# EAGLE board TMP006_breakout_v1 (EAGLE 5.11)
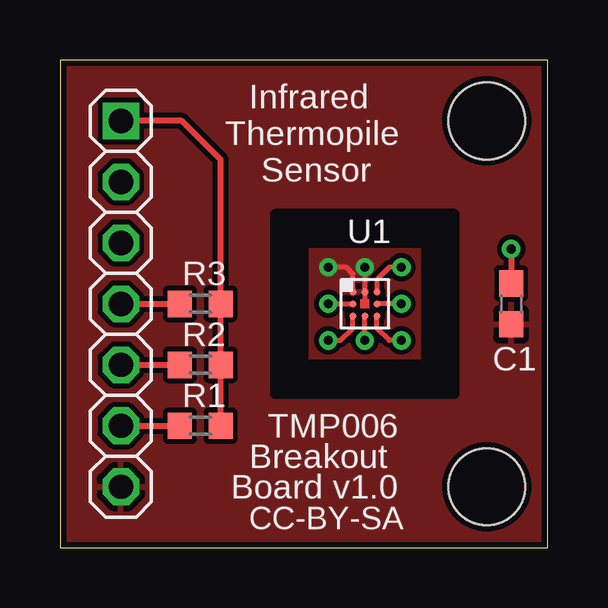
[diagram p0: board, top side]
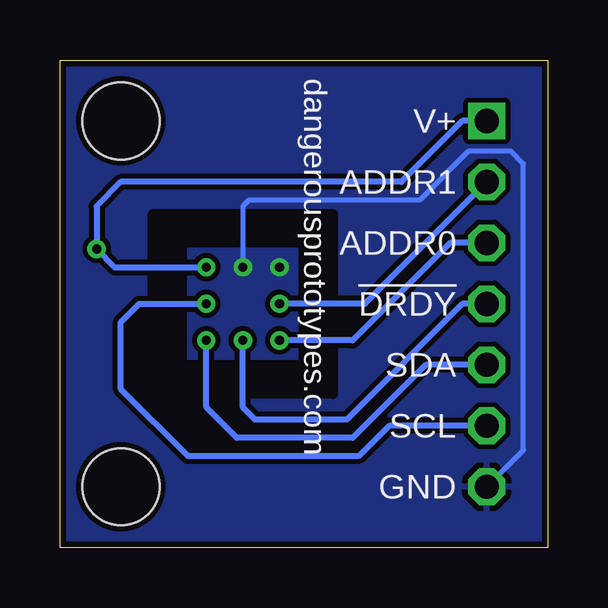
[diagram p1: board, bottom side, seen from below]

Size 20.32 x 20.32 mm. Coordinates in mm from the lower left corner, seen from the top.
Outline: 0,20.32 0,0 20.32,0 20.32,20.32 0,20.32
Copper layers (1*16): Top 0.035mm / dielectric 1.5mm / Bottom 0.035mm
Design rules "Fusion_eagle_rule_v1.1": minimum track width 6mil, minimum drill 12mil, track to track 6mil, track to pad 6mil, pad to pad 6mil, via to via 6mil, smd to smd 0mil, copper to edge 10mil, drill to drill 10mil, minimum pad ring 10mil, minimum via ring 6mil, stop-mask expansion 2mil, vias tented up to drill 100mil, thermal gap 10mil
Holes 3.2 mm at 17.78,17.78 17.78,2.54
tRestrict: area 9,6.4 to 16.4,7.6; area 9,6.4 to 10.2,13.9; area 15.2,6.4 to 16.4,13.9; area 9,12.7 to 16.4,13.9
bRestrict: area 15.2,6.4 to 16.4,13.9; area 9,6.4 to 16.4,7.6; area 9,6.4 to 10.2,13.9; area 9,12.7 to 16.4,13.9

## Footprints (pad centres in the part's own frame; a part is rotated, then mirrored left to right if it is on the bottom)
C603 = smd 1.1 x 1: 1 -0.85,0; 2 0.85,0
1X07 = drill 1.016 square: 1 -7.62,0 | drill 1.016 octagon: 2 -5.08,0; 3 -2.54,0; 4 0,0; 5 2.54,0; 6 5.08,0; 7 7.62,0
R603 = smd 1 x 1.1: 1 -0.85,0; 2 0.85,0
DSBGA-8 = smd 0.3 x 0.3: A1 -0.5,0.5; A2 0,0.5; A3 0.5,0.5; B1 -0.5,0; B3 0.5,0; C1 -0.5,-0.5; C2 0,-0.5; C3 0.5,-0.5

## Placement (x,y rotation side)
C1  0.1uF  [C603]  18.8,10.16 270 top
JP1  [1X07]  2.54,10.16 270 top
R1  10k  [R603]  5.84,5.08 0 top
R2  10k  [R603]  5.84,7.62 0 top
R3  10k  [R603]  5.84,10.16 0 top
U1  TMP006  [DSBGA-8]  12.7,10.16 0 top
U$1  DP_LOGO  [DP_LOGO]  1.78,-5.33 0 top  (outside the outline)

## Library data of the parts
C1 R1-R3 U1 = dp_devices
JP1 = pinhead
U$1 = dp_devices; FF1: fullfillment by; FF2: Seeed studio; FF3: www.seeedstudio.com; LICENSE: CC-BY-SA; PROJECT: TMP006 Breakout Board; URL1: http://; URL2: DangerousPrototypes.com

## Nets
!DRDY: JP1.4 R3.1 U1.C2
ADR0: JP1.3 U1.C1
ADR1: JP1.2 U1.B1
GND: C1.2 JP1.7 U1.A1 U1.A2
SCL: JP1.6 R1.1 U1.B3
SDA: JP1.5 R2.1 U1.C3
V+: C1.1 JP1.1 R1.2 R2.2 R3.2 U1.A3

## Tracks (layer width: path | path; a pad name or v marks a point on that pad's centre or on a via)
!DRDY  (via drill 0.38 pad 0.76)
  Top 0.203: v12.7,8.64 U1.C2
  Top 0.254: JP1.4 R3.1
  Bottom 0.254: v12.7,8.64 12.7,5.84 12.19,5.33 8.38,5.33 3.56,10.16 JP1.4
ADR0  (via drill 0.38 pad 0.76)
  Top 0.203: U1.C1 12.2,9.15 11.68,8.64 v11.18,8.64
  Bottom 0.254: v11.18,8.64 8.13,8.64 4.06,12.7 JP1.3
ADR1  (via drill 0.38 pad 0.76)
  Top 0.203: v11.18,10.16 U1.B1
  Bottom 0.254: v11.18,10.16 7.62,10.16 JP1.2
GND  (via drill 0.38 pad 0.76)
  Top 0.203: 12.7,10.16 U1.A2 v12.7,11.68 | U1.A1 12.2,11.42 11.94,11.68 v11.18,11.68
  Bottom 0.203: JP1.7 1.02,4.06 1.02,16 1.52,16.51 3.3,16.51 5.33,14.48 12.45,14.48 12.7,14.22 v12.7,11.68
  pour Top (isolate 0.203): 20.32,20.32 0,20.32 0,0 20.32,0
  pour Bottom (isolate 0.203): 0,0 20.32,0 20.32,20.32 0,20.32
SCL  (via drill 0.38 pad 0.76)
  Top 0.203: v14.22,10.16 U1.B3
  Top 0.254: JP1.6 R1.1
  Bottom 0.254: JP1.6 6.6,5.08 7.87,3.81 14.99,3.81 17.78,6.6 17.78,9.4 17.02,10.16 v14.22,10.16
SDA  (via drill 0.38 pad 0.76)
  Top 0.203: U1.C3 13.21,9.14 13.72,8.64 v14.22,8.64
  Top 0.254: JP1.5 R2.1
  Bottom 0.254: JP1.5 5.08,7.62 8.13,4.57 12.95,4.57 14.22,5.84 v14.22,8.64
V+  (via drill 0.38 pad 0.76)
  Top 0.203: U1.A3 13.2,11.17 13.72,11.68 v14.22,11.68
  Top 0.254: v18.8,12.45 C1.1 | R1.2 R2.2 R3.2 6.69,16.17 5.08,17.78 JP1.1
  Bottom 0.254: v14.22,11.68 18.03,11.68 v18.8,12.45 18.8,14.22 17.78,15.24 6.1,15.24 3.56,17.78 JP1.1
(copper drawn outside any net)
  shapes: Top area x1

## Text on the board
tNames: Infrared | Thermopile | Sensor | TMP006 | Breakout | Board v1.0 | CC-BY-SA
bNames: dangerousprototypes.com | V+ | ADDR1 | ADDR0 | !DRDY | SDA | SCL | GND